# Altium PCB CH32x203C8U6-R0-1v0.PcbDoc
Units mil, origin at the board's own origin, x right, y up, seen from the top; angles counter-clockwise.
Board outline 1801.31 x 2018.15 mil, 2 copper layers (Top Layer, Bottom Layer); 40 components, 57 nets, 208 pads, 228 vias.
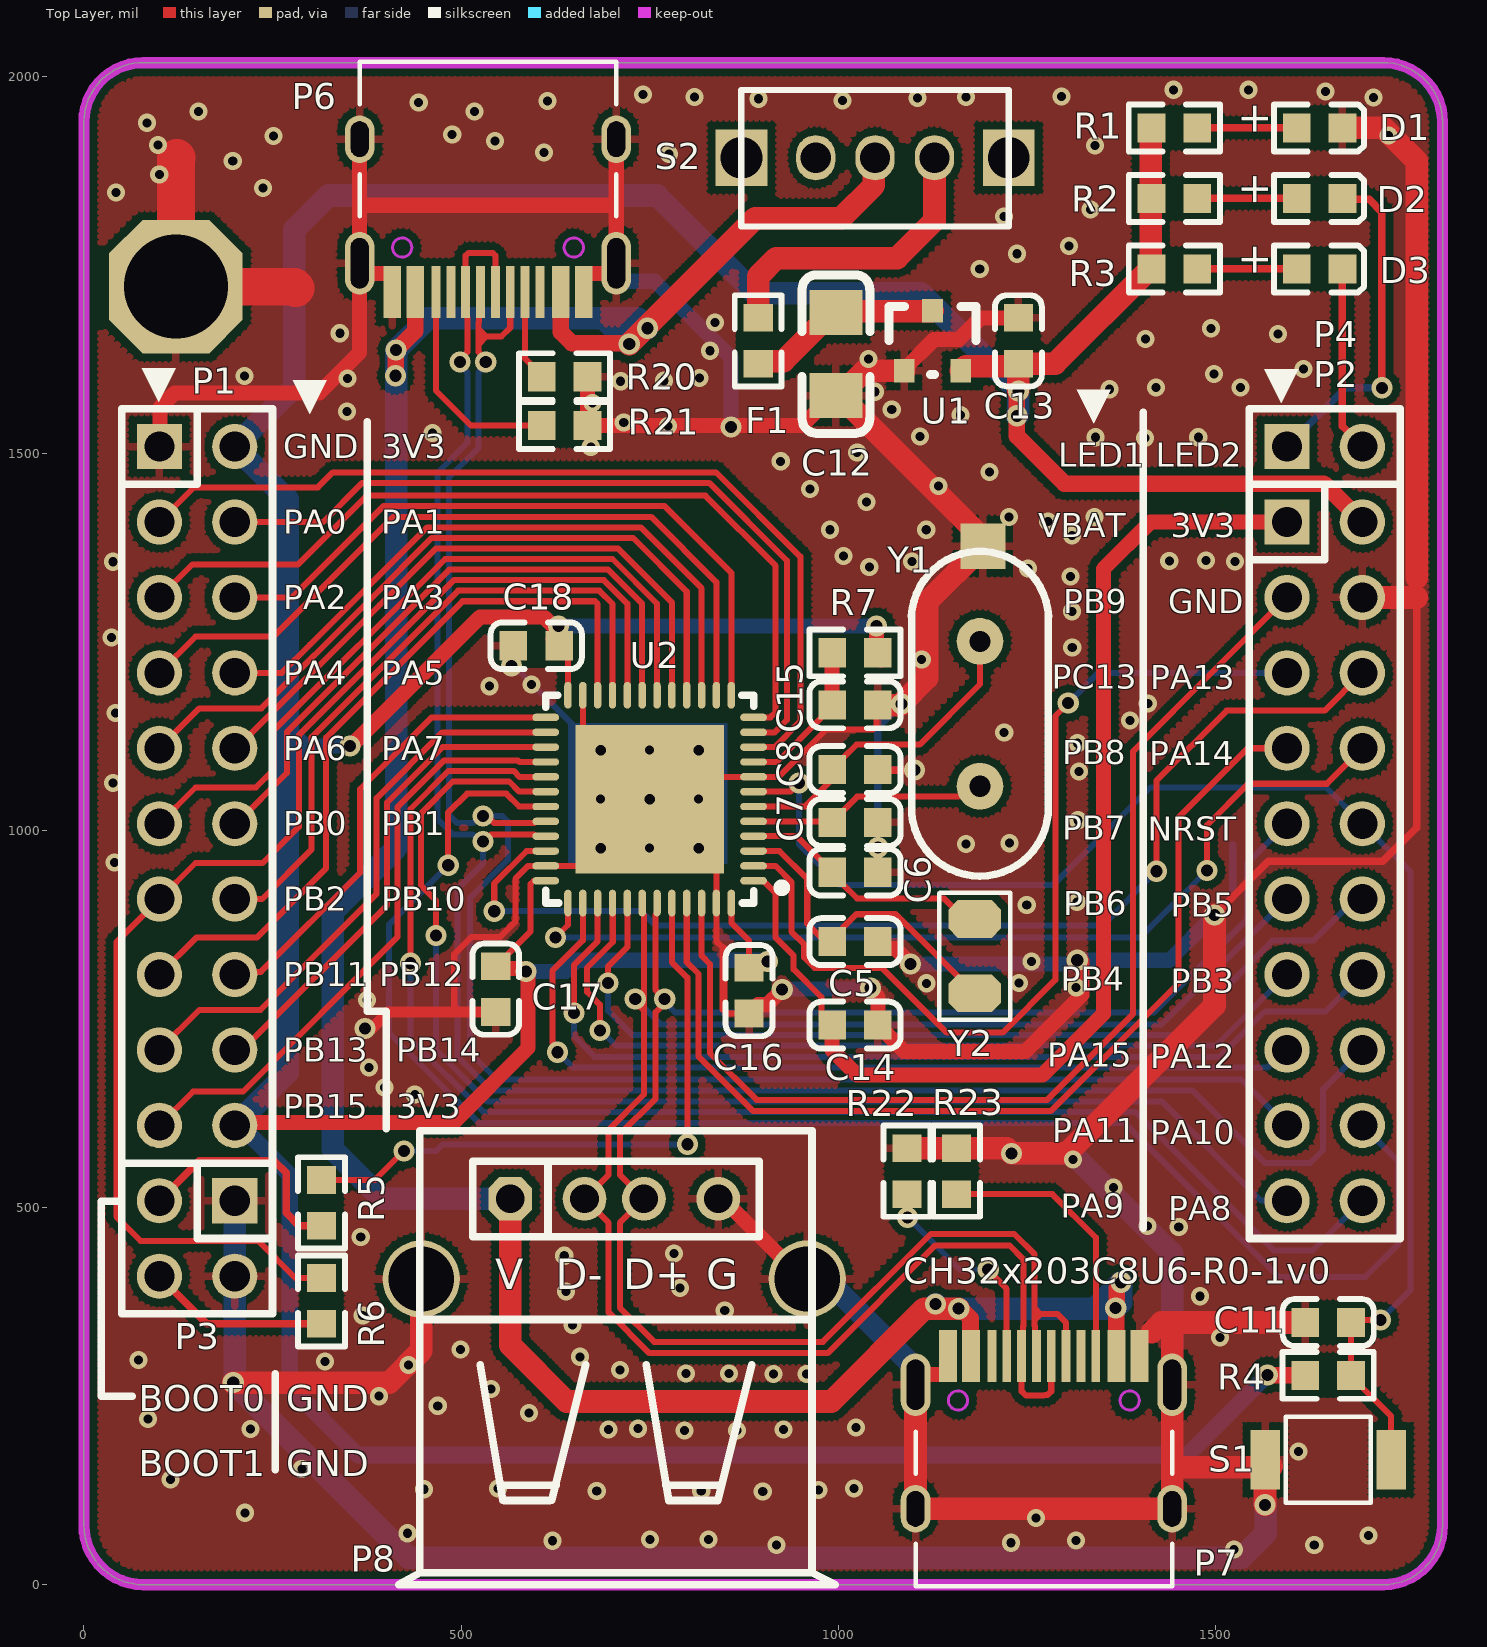
[diagram p0: Top Layer view]
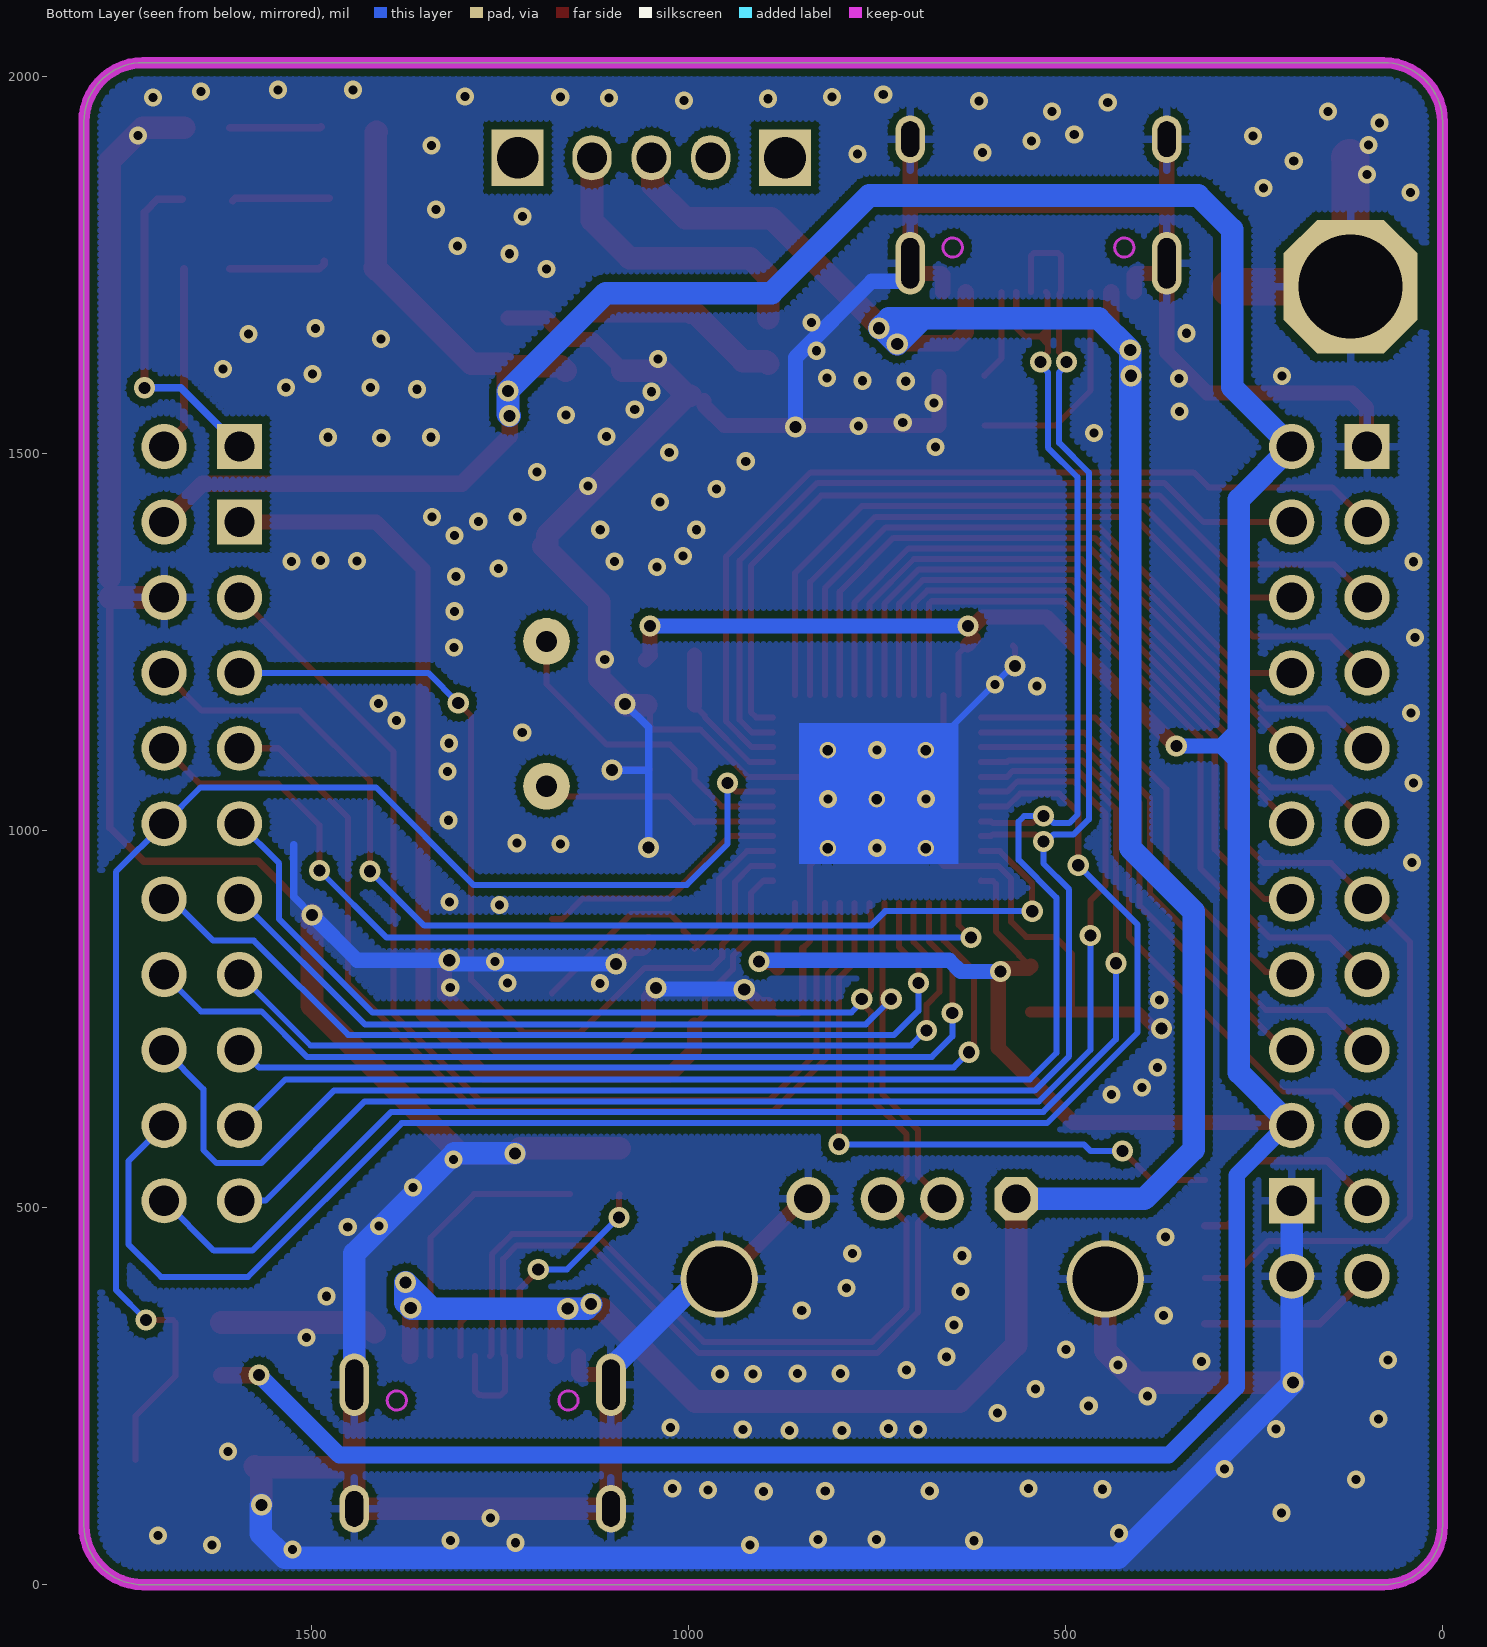
[diagram p1: Bottom Layer view, seen from below]

## Layer stack, top to bottom
Top Solder: solder mask 0.4, Solder Resist, Dk 3.5
Top Layer: signal copper 1.4
Dielectric 1: dielectric 12.6, FR-4, Dk 4.8
Bottom Layer: signal copper 1.4
Bottom Solder: solder mask 0.4, Solder Resist, Dk 3.5

## Board outline
0,78.74 0,1939.41 cw(c78.74,1939.41) 78.74,2018.15 1722.6,2018.15 cw(c1722.6,1939.43) 1801.31,1939.43 1801.31,78.74 cw(c1722.57,78.74) 1722.57,0 78.74,0 cw(c78.74,78.74)

## Design rules (kind name [scope] priority, off if disabled: settings)
Clearance Clearance_1 [InPolygon] p1: gap=10 ignorepadtopadclearanceinfootprint=FALSE
Clearance [All] p2: gap=6 ignorepadtopadclearanceinfootprint=FALSE
ComponentClearance [All] p1 off: gap=10 collisioncheckmode=3 verticalgap=10 showdistances=FALSE
DiffPairsRouting [All] p1: maxlimit=10 minlimit=7 mostfreqgap=8 toplayer_minwidth=6 toplayer_maxwidth=15 toplayer_prefwidth=8 bottomlayer_minwidth=6 bottomlayer_maxwidth=15 bottomlayer_prefwidth=8 maxuncoupledlength=500
MinimumSolderMaskSliver [All] p1 off: minsoldermaskwidth=10
PolygonConnect PolygonConnect_1 [IsVia] p1: connectstyle=Direct reliefconductorwidth=10 reliefentries=4 polygonreliefangle="90 Angle" airgapwidth=10
PolygonConnect [All] p2: connectstyle=Relief reliefconductorwidth=10 reliefentries=4 polygonreliefangle="90 Angle" airgapwidth=10
RoutingVias [All] p1: holewidth=16 width=28 viastyle="Through Hole" minholewidth=12 minwidth=24 maxholewidth=28 maxwidth=50
SilkToSilkClearance [All] p1 off: silktosilkclearance=10
SilkToSolderMaskClearance [IsPad] p1 off: minsilkscreentomaskgap=10 clearancetoexposedcopper=TRUE
SolderMaskExpansion [All] p1: expansion=4 istentingtop=FALSE
Width [All] p1: maxlimit=100 minlimit=6 preferedwidth=10
25 further rules are at their usual default settings.

## Classes and differential pairs
differential pair NewDifferentialPair2: +PA11 -PA12
differential pair NewDifferentialPair1: +PB6 -PB7

## Components (designator, comment, footprint, x,y, rotation, side; value= is the part's Value field where it differs from the comment)
C5 "12pF" 0603_C 992,852.69 r0 top
C6 "12pF" 0603_C 992,944.69 r0 top
C7 "22pF" 0603_C 1052.63,1010.69 r180 top
C8 "22pF" 0603_C 1052.63,1080.69 r180 top
C11 "0.1uF" 0603_C 1619.38,347.69 r0 top
C12 "10uF" 3216_C 997.01,1686.69 r90 top
C13 "10uF" 0603_C 1239.01,1619 r90 top
C14 "0.1uF" 0603_C 992,742 r0 top value=15pF
C15 "0.1uF" 0603_C 992,1166.69 r0 top value=15pF
C16 "0.1uF" 0603_C 882.01,757.37 r90 top value=15pF
C17 "0.1uF" 0603_C 546,759.37 r90 top value=15pF
C18 "0.1uF" 0603_C 569.37,1245 r0 top value=15pF
D1 "POWER  red" 0603+ 1608.01,1931.69 r0 top
D2 "LED1" 0603+ 1608.01,1838.19 r0 top
D3 "LED2" 0603+ 1608.01,1744.69 r0 top
F1 "500mA" 0603 894,1679.63 r270 top
P1 "HEADER 10x2" IDC20-2.54MM 100.01,1509.07 r0 top
P2 "HEADER 10x2" IDC20-2.54MM 1595.01,1409.07 r0 top
P3 "Header 2X2" IDC4-2.54mm 200.01,509.07 r270 top
P4 "HEADER 2" SIP2-2.54mm 1595.01,1509.07 r270 top
P6 "TYPE-C" TYPE-C-Receptacle-2.0 535.68,1713.93 r180 top
P7 "TYPE-C" TYPE-C-Receptacle-2.0 1272.68,303.38 r0 top
P8 "USB_A" USBAF 565.29,511.69 r0 top
R1 "1K" 0603 1476.01,1931.69 r180 top
R2 "1K" 0603 1415.38,1838.19 r0 top
R3 "1K" 0603 1415.38,1744.69 r0 top
R4 "10K" 0603 1680.01,277.69 r180 top
R5 "10K" 0603 315.01,536.69 r270 top
R6 "10K" 0603 315.01,406.69 r270 top
R7 "0Ω" 0603 1052.63,1235.69 r180 top value=10K
R20 "NC(5.1K)" 0603 607,1601.69 r0 top
R21 "NC(5.1K)" 0603 607,1537 r0 top
R22 "NC(5.1K)" 0603 1091.01,518 r90 top
R23 "NC(5.1K)" 0603 1157,518 r90 top
S1 "RST" 贴片按键 1733.2,165.69 r180 top
S2 "SW" KEY2 1049,1892 r0 top
U1 "6219P33M" SOT-23 1087.61,1609.55 r0 top
U2 "CH32V203CxU" QFN48_7X7 750.01,1041.69 r90 top
Y1 "8M" XT_AT49 1188.01,1250.81 r180 top
Y2 "32.768k" FC-135 1181.01,784.26 r90 top

## Footprints (in the part's own frame and the unit in brackets; to place one, negate y for a bottom-side part, rotate by r counter-clockwise, add the part's x,y. Pads: shape width x height; smd on the part's side, far side on the other; paste and mask are expansions set on the pad)
0603 [mm]
  rect 0.93x0.98 smd: 1(0,0) 2(1.54,0)
  silkscreen extent -0.76,-0.79 2.3,0.79
0603+ [mm]
  rect 0.93x0.98 smd: 1(0,0) 2(1.54,0)
  silkscreen extent -0.76,-0.79 2.27,0.79
0603_C [mm]
  rect 0.93x0.98 smd: 1(0,0) 2(1.54,0)
  silkscreen extent -0.76,-0.79 2.31,0.79
3216_C [mil]
  rect 60x70 smd: 1(0,0) 2(-110,0)
  silkscreen extent -160,-45 50,45
FC-135 [mil]
  oct 50x70 smd: 1(0,0) 2(98.43,0)
  silkscreen extent -35,-47 133,47
IDC4-2.54mm [mil]
  rect 60x60 hole 40: 1(0,0)
  round 60 hole 40: 2(100,0) 3(0,-100) 4(100,-100)
  silkscreen extent -50,-150 150,50
IDC20-2.54MM [mil]
  rect 60x60 hole 40: 1(0,0)
  round 60 hole 40: 2(100,0) 3(0,-100) 4(100,-100) 5(0,-200) 6(100,-200) 7(0,-300) 8(100,-300) 9(0,-400) 10(100,-400) 11(0,-500) 12(100,-500) 13(0,-600) 14(100,-600) 15(0,-700) 16(100,-700) 17(0,-800) 18(100,-800) 19(0,-900) 20(100,-900)
  silkscreen extent -50,-950 150,50
KEY2 [mm]
  rect 1.75x1.9 hole 1.4: 0(-4.5,0) 0(4.5,0)
  oval 1.321x1.524 hole 1.016: 1(0,0) 2(-2,0) 3(2,0)
  silkscreen extent -4.51,-2.31 4.5,2.29
QFN48_7X7 [mm]
  round 0.559 hole 0.356 mask+0.102: 0(-1.651,-1.651) 0(-1.651,1.651) 0(0,0) 0(1.651,-1.651) 0(1.651,1.651)
  rect 5x5 smd mask+0.102: 0(0,0)
  oval 0.25x0.9 smd mask+0.102: 1(-2.75,-3.5) 2(-2.25,-3.5) 3(-1.75,-3.5) 4(-1.25,-3.5) 5(-0.75,-3.5) 6(-0.25,-3.5) 7(0.25,-3.5) 8(0.75,-3.5) 9(1.25,-3.5) 10(1.75,-3.5) 11(2.25,-3.5) 12(2.75,-3.5) 25(2.75,3.5) 26(2.25,3.5) 27(1.75,3.5) 28(1.25,3.5) 29(0.75,3.5) 30(0.25,3.5) 31(-0.25,3.5) 32(-0.75,3.5) 33(-1.25,3.5) 34(-1.75,3.5) 35(-2.25,3.5) 36(-2.75,3.5)
  oval 0.9x0.25 smd mask+0.102: 13(3.5,-2.75) 14(3.5,-2.25) 15(3.5,-1.75) 16(3.5,-1.25) 17(3.5,-0.75) 18(3.5,-0.25) 19(3.5,0.25) 20(3.5,0.75) 21(3.5,1.25) 22(3.5,1.75) 23(3.5,2.25) 24(3.5,2.75) 37(-3.5,2.75) 38(-3.5,2.25) 39(-3.5,1.75) 40(-3.5,1.25) 41(-3.5,0.75) 42(-3.5,0.25) 43(-3.5,-0.25) 44(-3.5,-0.75) 45(-3.5,-1.25) 46(-3.5,-1.75) 47(-3.5,-2.25) 48(-3.5,-2.75)
  silkscreen extent -3.5,-4.58 3.5,3.5
SIP2-2.54mm [mil]
  rect 60x60 hole 40: 1(0,0)
  round 60 hole 40: 2(0,100)
  silkscreen extent -50,-50 50,150
SOT-23 [mm]
  rect 0.7x0.8 smd: 1(0,0) 2(1.9,0) 3(0.95,2.02)
  silkscreen extent -0.51,-0.13 2.41,2.16
TYPE-C-Receptacle-2.0 [mm]
  oval 1x2.1 hole 0.6 slot 1.7 at 90 deg: 0(-4.32,-0.97) 0(4.32,-0.97)
  oval 1x1.6 hole 0.6 slot 1.2 at 90 deg: 0(-4.32,-5.15) 0(4.32,-5.15)
  rect 0.6x1.75 smd: A1(-3.225,0) A4(-2.45,0) B1(3.225,0) B4(2.45,0)
  rect 0.3x1.75 smd: A5(-1.25,0) A6(-0.25,0) A7(0.25,0) A8(1.25,0) B5(1.75,0) B6(0.75,0) B7(-0.75,0) B8(-1.75,0)
  Keep-Out Layer circle w0.1: c-2.89,-1.5 r0.325
  Keep-Out Layer circle w0.1: c2.89,-1.5 r0.325
  silkscreen extent -4.32,-7.75 4.32,-2.55
USBAF [mm]
  round 2.6 hole 2.2: 0(-3,-2.7) 0(10,-2.7)
  oct 1.473x1.473 hole 0.965: 1(0,0)
  round 1.473 hole 0.965: 2(2.5,0) 3(4.5,0) 4(7,0)
  silkscreen extent -3.75,-12.99 10.95,2.29
XT_AT49 [mil]
  rect 60x60 smd: 0(-3.99,-126.19)
  round 62 hole 28: 1(0,0) 2(0,192.13)
  silkscreen extent -91,-119 91,311
贴片按键 [mm]
  rect 1x2 smd: 1(0,0) 2(4.242,0)
  silkscreen extent 0.69,-1.45 3.55,1.45

## Part data
C5 C6 C7 C8 C11 C14 C15 C16 C17 C18: library part Cap, "Capacitor", LatestRevisionDate=17-Jul-2002, LatestRevisionNote="Re-released for DXP Platform.", PackageReference=RAD-0.3, Published=8-Jun-2000, Publisher="Altium Limited"
C12 C13: library part CAP, "Capacitor"
D1 D2 D3: library part LED0, "Typical INFRARED GaAs LED", LatestRevisionDate=08-Jul-2005, LatestRevisionNote="Mech Layer 1 removed.", PackageReference=LED-0, Published=8-Jun-2000, Publisher="Altium Limited"
F1: library part FUSE1, "Fuse"
P1 P2: library part "Header 10X2", "Header, 10-Pin, Dual row"
P3: "Header, 2-Pin, Dual row", LatestRevisionDate=17-Jul-2002, LatestRevisionNote="Re-released for DXP Platform.", Publisher="Altium Limited"
P4: library part 2HEAD
P6 P7: library part TYPE-C1
P8: library part USB, "USB Port"
R1 R2 R3: library part "Res Semi", "Semiconductor Resistor", LatestRevisionDate=17-Jul-2002, LatestRevisionNote="Re-released for DXP Platform.", PackageReference=AXIAL-0.5, Published=8-Jun-2000, Publisher="Altium Limited"
R4 R5 R6 R7 R20 R21 R22 R23: library part Res2, "Resistor"
  R4 R5 R6 R7: LatestRevisionDate=17-Jul-2002, LatestRevisionNote="Re-released for DXP Platform.", PackageReference=AXIAL-0.4, Published=8-Jun-2000, Publisher="Altium Limited"
S1: library part KEY
U2: "RISC-V LMD-MCU, 144MHz, 2*USB FS, CAN"
Y1 Y2: library part XTAL, "Crystal Oscillator", LatestRevisionDate=17-Jul-2002, LatestRevisionNote="Re-released for DXP Platform.", PackageReference=R38, Published=8-Jun-2000, Publisher="Altium Limited"

## Free pads (board coordinates)
  oct 177.17x177.17 hole 137.8: 0(121.96,1721.05)

## Via types
v1: diameter 24, hole 12, Top Layer to Bottom Layer, tented both sides, 173 vias
v2: diameter 28, hole 16, Top Layer to Bottom Layer, tented both sides, 55 vias

## Nets (pads, with @x,y where several pads share a name; then routed paths per layer and width w, separated by ;. In a path a pad name is that pad's centre, name@x,y a point inside that pad or via, vN(x,y) a via of type N, cw(c..) or ccw(c..) an arc to the next point about the centre after c; other vN are vias at no path point)
+5V: P6.A4 P6.B4 P7.A4 P7.B4 P8.1 S2.1 | length 3885.2
  Top Layer w22: v2(413,1603) 413.5,1603.5 413.5,1636.5 v2(414,1637) 439.22,1662.22 P6.B4 ; P6.A4 632.14,1660.86 647,1646 v2@723,1646 ; v2(1159.82,366) 1160.97,364.85 1163.9,364.85 1175.41,353.33 1175.41,304.19 P7.A4 ; P7.B4 1368.57,303.95 1368.57,366.43 v2(1368,367) 1369.15,368.15 1369.15,393.52 1375,399.38 v2(1375,401)
  Top Layer w30: P8.1 565.29,317.71 640,243 991,243 1114,366 v2(1159.82,366) ; v2(723,1645) 890,1812 1004,1812 1047.4,1855.4 1047.4,1890.4 S2.1
  Bottom Layer w30: P8.1 395.31,511.69 330,577 330,893 414,977 v2(414,1637) 456,1679 689,1679 ; v2(1129,372) 1135,366 v2(1159.82,366) 1340,366 ; 689,1679 734,1679 v2(747,1666) 744,1666 v2(723,1645) 689,1679 ; 1340,366 v2(1375,401) 1375,374 v2(1368,367) 1367,366 1340,366
BOOT0: R5.1 U2.44 | length 832.9
  Top Layer w8: R5.1 385.71,536.69 v2(424.34,575.31) ; U2.44 779.54,825.46 800,805 v2(800,584)
  Bottom Layer w8: v2(424.34,575.31) 466.98,575.31 475.66,584 v2(800,584)
BOOT1: P1.13 R6.1 U2.20 | length 1751.5
  Top Layer w8: R6.1 280.31,406.69 231,456 75,456 43,488 43,852.05 P1.13 147.95,957 237,957 285,1005 285,1126.6 490.4,1332 689.2,1332 720.49,1300.71 U2.20
GND: C5.2 C6.2 C7.1 C8.1 C11.1 C12.2 C13.2 C14.2 C15.2 C16.1 C17.1 C18.1 D1.2 P1.1 P2.4 P3.1 P3.2 P6.0 P6.A1 P6.B1 P7.0 P7.A1 P7.B1 P8.0 P8.4 pad.0 R20.2 R21.2 R22.2 R23.2 S1.2 U1.1 U2.0 U2.8 U2.23 U2.35 U2.47 Y1.0 | length 12470.7
  Top Layer w8: 499,759.37 491,767.37 491,836 514,859 552,859 572,879 572,936 589.1,953.1 U2.35 661.43,953.1 685.01,976.69 U2.0@750.01,1041.69 ; v2(567,1218) 567,1242.63 C18.1 ; U2.23 661.43,1130.27 685.01,1106.69 U2.0@750.01,1041.69 ; 848,763 853.63,757.37 C16.1 C16.1@893.62,768.98 ; 848,844 838.6,853.4 U2.47 838.6,953.1 815.01,976.69 U2.0@750.01,1041.69 ; C15.2@1056,1166 1051,1161 1051,1138.69 1046.31,1134 984,1134 921.21,1071.21 U2.8 779.54,1071.21 U2.0@750.01,1041.69
  Top Layer w10: 848,763 848,844 ; C8.1 1053.32,1080 v2(1101,1080) ; v2(1499,888) 1570,959 1722,959 1767,1004 1767,1309 1767,1335
  Top Layer w15: v2(372.65,737.52) 381.63,737.52 403.48,759.37 499,759.37 C17.1
  Top Layer w20: P1.1 101,1510.05 101,1561 120,1580 312,1580 365.6,1633.6 P6.0@365.6,1738.38 ; P6.0@365.6,1746.4 365.6,1752.12 365.6,1829 ; P6.0@365.6,1916.69 365.6,1829 ; P6.0@373.62,1738.38 406.9,1738.38 408.71,1736.57 P6.B1 ; P6.A1 662.65,1736.57 664.46,1738.38 696.81,1738.38 701,1742.57 P6.0@701,1751 ; R21.2 R21.2@668,1537 ; R20.2 667.63,1537.37 R21.2@668,1537 ; P6.0@705.76,1752.12 705.76,1829 ; P6.0@705.76,1916.69 705.76,1829 ; P8.4 846.79,511.69 953.09,405.39 P8.0@958.99,405.39 ; C16.1@893.62,768.98 905.79,768.98 v2(925.81,789) ; C12.2@979,1570 979,1563.67 952.33,1537 R21.2@668,1537 ; v2(1043,791) 1043,788.84 1052.63,779.21 C14.2 ; C5.2 1052.63,851.7 1060.94,843.39 1075.61,843.39 v2(1096,823) ; C14.2@1061.92,732.71 1087.63,707 1248,707 1323,782 1323,827 v2@1322,828 ; U1.1 1087.61,1611.52 1127.09,1651 1160,1651 1188.63,1679.63 C13.2 ; P7.0@1102.6,265.19 1102.6,269.98 1111.55,278.93 1143.9,278.93 1145.71,280.74 P7.A1 ; 365.6,1829 705.76,1829
  Top Layer w30: v2(198,268) 405,268 447.18,310.18 P8.0@447.18,405.39 ; C12.2 C12.2@1002.01,1576.69 ; C15.2@1056,1166 1082,1166 v2(1084,1168) 1118,1202 1118,1303 Y1.0 ; U1.1 1034.88,1609.55 C12.2@1002.01,1576.69 ; R22.2 R23.2 1223.37,578.63 v2(1230,572) 1303,572 1499,768 v2(1499,888) ; P7.0@1102.6,100.62 1102.98,101 P7.0@1442.76,101 ; P7.0@1102.6,265.19 1102.6,108.4 P7.0@1103,108 ; Y1.0@1187,1377 1187,1391.7 C12.2@1002.01,1576.69 ; 1416,335 1428.69,347.69 C11.1 ; 1442,345 1442.76,344.24 P7.0@1442.76,265.19 ; P7.0@1442.76,100.62 P7.0@1442.76,101 ; P7.0@1446,268 1442.76,264.76 1442.76,156 ; P7.0@1448,101 P7.0@1442.76,101 ; v2(1566,106) 1566,154 S1.2@1568,156 ; S1.2@1575,157 1574,156 S1.2@1568,156 ; D1.2 1723.31,1931.69 1767,1888 1767,1335 ; P2.4@1695.01,1309 1767,1309 ; P7.0@1442.76,101 1442.76,156 ; 1442.76,156 S1.2@1568,156
  Top Layer w50: 123,1892 121.96,1890.96 pad.0 278.95,1721.05 281,1719
  Bottom Layer w8: v2(567,1218) 570.35,1218 681.66,1106.69 U2.0@685.01,1106.69
  Bottom Layer w10: v2(1052.63,977.69) 1052.63,1080 ; v2(1084,1168) 1052.63,1136.63 1052.63,1080 ; v2(1101,1080) 1052.63,1080 ; v2(1499,888) 1523,912 1523,981
  Bottom Layer w20: P6.0@705.76,1752.12 705.76,1737.18 714.71,1728.23 756.77,1728.23 858,1627 v2(858,1535) ; v2(925.81,789) 926.81,790 1042,790 v2(1043,791) ; v2(1096,823) 1317,823 1322,828 1439,828 v2(1499,888)
  Bottom Layer w30: P3.2 200.01,270.01 v2(198,268) 430,36 1535,36 1567,68 1567,105 v2(1566,106) ; P3.2@200.01,413.99 P3.1 ; P8.0@970,400 978.46,391.54 997.91,391.54 1102.6,286.84 P7.0@1102.6,265.19 ; v2(1230,572) 1310,572 1442.76,439.24 P7.0@1442.76,265.19
  other v1: 1524.74,46.74 918.23,52.59 1631.27,52.66 1229.21,55.68 621.44,58.3 1315.17,58.54 750.71,59.98 828.07,59.98 1703.27,65.49 428.8,68.29 1262.16,88.63 213.34,95.4 900.03,123.75 679.93,124.46 818.46,124.46 974.13,125.36 450.81,126.59 548.85,127.66 1020.85,127.78 114.88,139.63 288.83,153.23 1610.15,176.69 796.49,204.73 865.65,204.73 695.45,205.81 927.76,206.04 220.63,206.52 734.35,206.89 1023.44,208.51 84.92,219.54 589.86,227.74 469.13,237.27 391.29,249.97 539.82,259.51 798.15,280.1 855.34,280.1 914.14,279.29 958.04,279.29 710.88,284.98 430.21,291.28 319.81,296.04 72.07,298.02 657.6,302.24 499.31,311.93 1506.17,328 647.76,344.21 369.68,356.86 849.6,363.7 1479.76,382.49 639.19,388.63 790.37,393.31 636.85,436.17 782.58,439.29 367.04,461.1 1451.56,474.44 1410.1,475.75 1365.15,526.88 1311.22,563.96 438.67,650.07 398.42,659.34 377.87,685.98 375.55,775.16 1315.62,791.86 1117.06,797.44 1239.98,797.96 1256.2,826.34 1250.07,901.03 1316.57,905.07 40.73,957.59 750.01,976.69 1169.3,981.9 1227.4,983.18 1318.01,1013.63 685.01,1041.69 815.01,1041.69 38.72,1062.79 1319.45,1078.34 750.01,1106.69 1317.29,1115.73 1220.18,1129.91 1386.96,1145.77 41.73,1155.98 1410.53,1168.25 537.72,1191.35 593.54,1193.63 1110.77,1226.77 1310.4,1242.86 36.72,1256.18 1309.8,1290.69 1308.01,1336.71 1251.91,1347.39 1041.28,1349.24 38.72,1356.37 1097.72,1356.87 1526.23,1356.87 1439.05,1357.42 1487.85,1357.97 1006.96,1363.73 1309.8,1391.11 989.42,1398.82 1116.78,1398.82 1278.46,1409.72 1226.69,1415.48 1339.69,1415.62 1037.47,1435.42 962.73,1452.96 1132.8,1456.78 1200.63,1475.16 923.83,1489.57 1025.27,1501.01 672,1508.5 1407.1,1520.5 1341.39,1521.44 1477.49,1521.44 1108.39,1522.36 462.07,1526.92 774.36,1536.09 715.69,1541.23 1161.96,1550.81 348.8,1555.64 1071.02,1558.21 674.52,1567.07 1048.73,1581.74 1359.89,1585.06 1421.29,1587.39 1533.22,1587.39 711.68,1595.66 769.02,1596.34 349.59,1599.51 816.3,1600.15 212.81,1602.69 1498.24,1605.27 1616.76,1611.68 1040.3,1625.04 829.84,1636.12 1407.3,1651.91 1582.96,1658.12 339.22,1659.34 1494.35,1665.9 836.68,1673.39 1187.76,1744.37 1237.17,1764.76 1306.19,1774.95 1219.92,1814.17 1334.43,1823.58 42.49,1846.18 237.38,1851.76 99.89,1869.66 197.29,1887.93 775.77,1897.19 609.81,1899.15 98.15,1908.8 1340.7,1908.28 545.13,1914.18 251.2,1920.97 1729.74,1921.59 488.29,1922.68 83.36,1938.37 152.06,1953.15 517.69,1953.38 443.86,1965.14 614.39,1967.11 1005.81,1967.89 894.44,1970.24 1105.41,1971.03 1709.9,1971.69 809.74,1972.6 1169.72,1972.6 1296,1973.38 741.5,1975.73 1646.22,1980.04 1444.75,1982.13 1543.92,1982.13
  other v2: 1317,828
LED1: D2.2 P4.1 | length 448.3
  Top Layer w10: D2.2@1671,1836.95 1704.05,1836.95 1721,1820 v2(1721,1587)
  Bottom Layer w10: P4.1 1620.01,1534.07 1672.95,1587 v2(1721,1587)
LED2: D3.2 P4.2 | length 242.8
  Top Layer w10: D3.2 1668.64,1536.36 P4.2@1693,1512
NetD1_1: D1.1 R1.1 | length 121.6
  Top Layer w10: R1.1@1487,1933 1488.31,1931.69 D1.1
NetD2_1: D2.1 R2.2 | length 129.3
  Top Layer w10: R2.2 1600.81,1838.19 D2.1@1604,1835
NetD3_1: D3.1 R3.2 | length 131.6
  Top Layer w10: R3.2@1483,1755 1483,1751.01 1489.32,1744.69 D3.1
NetF1_1: F1.1 S2.3 | length 402.9
  Top Layer w30: F1.1 894,1735 918,1759 1078,1759 1127.74,1808.74 S2.3
NetP3_3: P3.3 R5.2 | length 303.6
  Top Layer w10: P3.3 152.95,562 252,562 268,546 268,493 284.94,476.06 R5.2
NetP3_4: P3.4 R6.2 | length 241.1
  Top Layer w10: P3.4 163.03,346.06 R6.2
NetP6_A5: P6.A5 R20.1 | length 120.4
  Top Layer w8: P6.A5 584.89,1625.78 607,1603.67 R20.1@607,1602.69
NetP6_B5: P6.B5 R21.1 | length 290.1
  Top Layer w8: P6.B5 466.78,1583.22 513,1537 R21.1
NetP7_A5: P7.A5 R22.1 | length 291.7
  Top Layer w8: R22.1 1092,517.01 v2(1092,487) ; v2(1199,418) 1199,416.83 1223.47,392.36 P7.A5
  Bottom Layer w8: v2(1092,487) 1161,418 v2(1199,418)
NetP7_B5: P7.B5 R23.1 | length 365.5
  Top Layer w8: R23.1 1284,518 1341.58,460.42 P7.B5
NRST: C11.2 P2.10 R4.1 S1.1 U2.7 | length 1934.1
  Top Layer w8: U2.7 936.53,1051.53 v2(948,1063) ; v2(1719,351) 1683.33,351 C11.2 R4.1 1680.01,276.7 1733.2,223.52 S1.1
  Bottom Layer w8: v2(948,1063) 948,982 1002,928 1285,928 1414,1057 1647.08,1057 P2.10 1759,945.08 1759,391 v2(1719,351)
PA0: P1.3 U2.10 | length 1218.3
  Top Layer w8: P1.3 145.95,1455 310,1455 330,1475 838,1475 950,1363 950,1144.8 915.78,1110.58 U2.10
PA1: P1.4 U2.11 | length 1058.5
  Top Layer w8: P1.4 317.07,1409.07 369,1461 829,1461 932,1358 932,1146.6 915.67,1130.27 U2.11
PA2: P1.5 U2.12 | length 1137.5
  Top Layer w8: P1.5 143.95,1353 284,1353 375,1444 824,1444 917,1351 917,1157 909.95,1149.95 U2.12
PA3: P1.6 U2.13 | length 907.2
  Top Layer w8: P1.6 276.07,1309.07 397,1430 770,1430 858.28,1341.72 U2.13
PA4: P1.7 U2.14 | length 1010.1
  Top Layer w8: P1.7 147.95,1257 251,1257 410,1416 752,1416 838.6,1329.4 U2.14
PA5: P1.8 U2.15 | length 873.9
  Top Layer w8: P1.8 262.47,1209.07 300,1246.6 455.4,1402 738,1402 818.91,1321.09 U2.15
PA6: P1.9 U2.16 | length 981.5
  Top Layer w8: P1.9 152.95,1162 235.2,1162 378,1304.8 461.2,1388 728,1388 799.23,1316.77 U2.16
PA7: P1.10 U2.17 | length 841.9
  Top Layer w8: P1.10 202.07,1109.07 392,1299 467,1374 708,1374 779.54,1302.46 U2.17
PA8: P2.20 U2.29 | length 1914.8
  Top Layer w8: v2@434.53,824 433,825.53 433,1028.6 483.4,1079 569.6,1079 577.39,1071.21 U2.29
  Bottom Layer w8: v2(433,824) 433,723.19 529.19,627 1394,627 1578,443 1628.95,443 P2.20
PA9: P2.19 U2.30 | length 1721.2
  Top Layer w8: v2(467,861) 467,907 447,927 447,1022.8 489.2,1065 563.8,1065 577.27,1051.53 U2.30
  Bottom Layer w8: v2(467,861) 467,708.99 534.99,641 1429,641 1560.53,509.47 1594.61,509.47 P2.19
PA10: P2.18 U2.31 | length 2138.6
  Top Layer w8: v2(483,954) 483,1024 508,1049 560,1049 577.16,1031.84 U2.31
  Bottom Layer w8: v2(483,954) 404.18,875.18 404.18,732.21 524.39,612 1380,612 1584,408 1699,408 1742,451 1742,562.08 P2.18
PA11: P2.17 P6.A7 P6.B7 U2.32 | length 2467.8
  Top Layer w8: P6.A7 523.93,1712.02 523.93,1674.38 523.28,1673.73 523.28,1664.52 ; v2(529,1019.32) 534.41,1019.32 543.91,1009.82 596.58,1009.82 598.92,1012.16 U2.32 ; v2(532.78,1621) 532.78,1625.01 523.28,1634.51 523.28,1644.92 ; P6.B7 565.21,1666.88 553.65,1655.32 533.68,1655.32 ; 523.28,1644.92 523.28,1655.32 ; 523.28,1644.92 533.68,1655.32 ; 523.28,1655.32 532.48,1655.32 ; 523.28,1655.32 523.28,1664.52 ; 523.28,1664.52 532.48,1655.32 ; 532.48,1655.32 533.68,1655.32
  Bottom Layer w8: v2(532.78,1621) 532.78,1616.99 523.28,1607.49 523.28,1507.71 484,1468.43 484,1021 495.18,1009.82 515.49,1009.82 524.99,1019.32 v2(529,1019.32) 554.68,1019.32 562,1012 562,961 512,911 512,705 547,670 1534.08,670 P2.17
PA12: P2.16 P6.A6 P6.B6 U2.33 | length 2675.3
  Top Layer w8: v2(498.78,1621) 498.78,1625.01 508.28,1634.51 508.28,1649.11 P6.B6@508.28,1679.94 ; P6.B6@508.06,1679.94 508.06,1712.02 P6.B6 506.15,1762.17 509.67,1765.69 542.01,1765.69 545.52,1762.17 P6.A6 ; 539.67,994.82 596.58,994.82 598.92,992.47 U2.33
  Bottom Layer w8: v2(498.78,1621) 498.78,1616.99 508.28,1607.49 508.28,1513.93 469,1474.65 469,1014.79 488.97,994.82 515.49,994.82 524.99,985.32 v2(529,985.32) 529,956 495,922 495,700.79 540.79,655 1470,655 1566,559 1625.56,559 1643,576.44 1643,657.05 P2.16
PA13: P2.6 U2.34 | length 1490.9
  Top Layer w8: v2(544,893) 544,929.98 586.81,972.79 U2.34 ; v2(1422,946) 1422,1066 1515,1159 1644.95,1159 P2.6
  Bottom Layer w8: v2(544,893) 739,893 758,874 1350,874 v2(1422,946)
PA14: P2.8 U2.37 | length 1262
  Top Layer w8: v2(625,858) 641.75,874.75 U2.37 ; v2(1489,947) 1489,1007 1544,1062 1647.95,1062 P2.8
  Bottom Layer w8: v2(625,858) 1400,858 v2(1489,947)
PA15: P2.15 U2.38 | length 1202.4
  Top Layer w8: v2(628,706) 628,711.41 621,718.41 621,814 661.43,854.43 U2.38
  Bottom Layer w8: v2(628,706) 648,686 1569.31,686 1592.38,709.07 P2.15
PB0: P1.11 U2.18 | length 981.7
  Top Layer w8: P1.11 147.95,1057 228,1057 251,1080 251,1132.2 478.8,1360 700.8,1360 759.86,1300.94 U2.18
PB1: P1.12 U2.19 | length 851.5
  Top Layer w8: P1.12 201.77,1009.07 269,1076.29 269,1130.4 484.6,1346 695,1346 740.17,1300.83 U2.19
PB3: P2.14 U2.39 | length 1291.2
  Top Layer w8: v2(650,758) 650,822 681,853 681,875.94 681.12,876.06 U2.39
  Bottom Layer w8: v2(650,758) 650,727 677,700 1505.75,700 1565.75,760 1645.95,760 P2.14
PB4: P2.13 U2.40 | length 1148.5
  Top Layer w8: v2(684,735) 684,769 667,786 667,818 701.15,852.15 701.15,903.54 U2.40
  Bottom Layer w8: v2(684,735) 685.05,735 705.05,715 1500.95,715 P2.13
PB5: P2.12 U2.41 | length 1241.6
  Top Layer w8: v2(695,798) 695,820 720.84,845.84 720.84,903.54 U2.41
  Bottom Layer w8: v2(695,798) 695,761 727,729 1451,729 1576,854 1630,854 1685.07,909.07 P2.12
PB6: P2.11 P7.A7 P7.B7 P8.2 U2.42 | length 2453.8
  Top Layer w8: v2@731,769 734.51,769 742.51,761 ; U2.42 740.17,890.6 742.51,888.25 742.51,810.43 742.51,761 ; P7.A7 1282.52,256.37 1277.84,251.69 1274.01,251.69 1273.01,250.69 1249.01,250.69 1243.15,256.55 P7.B7 1245.06,305.28 1245.06,342.92 1245.5,343.36 1245.5,358.69 1245.5,431.72 1227.21,450 1129,450 986,307 749.7,307 695.59,361.11 695.59,479.82 P8.2 695.59,543.56 695.59,603.26 742.51,650.19 742.51,761
  Bottom Layer w8: v2@731.98,769.98 737.53,769.98 764.51,743 1428.95,743 P2.11
  other v2: 731,776.51
PB7: P2.9 P7.A6 P7.B6 P8.3 U2.43 | length 2463.6
  Top Layer w8: U2.43 759.86,890.6 757.51,888.25 757.51,816.64 757.51,789 v2(770,776.51) 770,771.1 758,759.1 758,752.06 757.51,751.57 757.51,643.97 710.59,597.05 710.59,543.56 P8.3 710.59,479.82 710.59,367.33 755.91,322 979.79,322 1122.79,465 1233.43,465 1260.5,437.93 1260.5,366.35 ; 1260.5,368 1260.5,366.35 ; P7.A6 1260.93,305.28 1260.93,342.92 1260.5,343.36 1260.5,351.02 ; P7.B6 1302.21,347.49 1291.01,358.69 1268.16,358.69 ; 1260.5,351.02 1260.5,358.69 ; 1260.5,351.02 1268.16,358.69 ; 1260.5,358.69 1260.5,366.35 ; 1260.5,358.69 1268.16,358.69 ; 1260.5,366.35 1268.16,358.69
  Bottom Layer w8: v2(770,776.51) 770,772.68 783.68,759 1419,759 1542.4,882.4 1542.4,956.45 P2.9
PB8: P2.7 U2.45 | length 1348.2
  Top Layer w8: U2.45 799.23,825.57 815,809.8 815,700.2 887.2,628 1281.8,628 1451,797.2 1451,1017 1543.07,1109.07 P2.7
PB9: P2.3 U2.46 | length 1474
  Top Layer w8: U2.46 818.91,834.09 830,823 830,705 892,643 1277,643 1391,757 1391,1105.05 1499.03,1213.09 P2.3
PB10: P1.14 U2.21 | length 885.7
  Top Layer w8: P1.14 236.07,909.07 302,975 302,1123.8 496.2,1318 683.4,1318 700.8,1300.6 U2.21
PB11: P1.15 U2.22 | length 1010
  Top Layer w8: P1.15 148.95,858 229.15,858 321,949.85 321,1123 502,1304 677.6,1304 681.12,1300.49 U2.22
PB12: P1.16 U2.25 | length 618.4
  Top Layer w8: P1.16 203.45,812.5 234.5,812.5 366,944 366,1055 460.95,1149.95 U2.25
PB13: P1.17 U2.26 | length 761.1
  Top Layer w8: P1.17 152.95,762 234,762 388,916 388,1042.99 475.27,1130.27 U2.26
PB14: P1.18 U2.27 | length 658.3
  Top Layer w8: P1.18 210.07,709.07 402,901 402,1037.2 475.39,1110.58 U2.27
PB15: P1.19 U2.28 | length 814.5
  Top Layer w8: P1.19 144.95,654 211,654 416,859 416,1031.4 477.6,1093 575.4,1093 577.5,1090.9 U2.28
PC13: P2.5 U2.2 | length 1250.2
  Top Layer w8: U2.2 916.9,953.1 938,932 938,866 955,849 955,831.8 968.8,818 1058,818 1144,732 1218,732 1288,802 1288,1151.86 1305,1168.86 v2(1305,1169)
  Bottom Layer w8: v2(1305,1169) 1345.07,1209.07 P2.5
PC14: C5.1 U2.3 Y2.1 | length 444.3
  Top Layer w8: U2.3 922.21,972.79 959,936 959,876.67 977.69,857.98 977.69,856.99 992,842.69 C5.1@992,843.67 ; C5.1 1006.31,866.99 1006.31,871.15 1024.16,889 1076.27,889 Y2.1
PC15: C6.1 U2.4 Y2.2 | length 340.2
  Top Layer w8: U2.4 945.2,992.47 977.69,959.98 977.69,958.99 C6.1 1006.31,930.38 1006.31,928.69 1025,910 1140,910 1167.31,882.69 Y2.2
PD0: C7.2 U2.5 Y1.2 | length 321.3
  Top Layer w8: U2.5 990.53,1012.16 C7.2 992,1011.67 1025.33,1045 1159.72,1045 1173.4,1058.69 Y1.2
PD1: C8.2 U2.6 Y1.1 | length 432.2
  Top Layer w8: U2.6 955.84,1031.84 992,1068 992,1081.67 1006.31,1095.98 1024.33,1114 1108,1114 1188.01,1194.01 Y1.1
V5V: C12.1 F1.2 U1.3 | length 260
  Top Layer w30: F1.2 897.31,1622.31 927.64,1622.31 992.01,1686.69 C12.1 998.66,1688.33 1124.27,1688.33 U1.3
VBAT: C14.1 P2.1 U2.1 | length 1535
  Top Layer w8: U2.1 900.6,933.42 917,917.02 917,858 941,834 941,816 977.69,779.31 977.69,756.31 C14.1
  Top Layer w20: C14.1 992,709 1025,676 1271,676 1352,757 1352,1347 1414,1409 P2.1@1589,1409
VCC: C13.1 C16.2 C17.2 C18.2 P1.2 P1.20 P2.2 R1.2 R2.1 R3.1 R4.2 R7.1 U1.2 U2.24 U2.36 U2.48 | length 7540.1
  Top Layer w8: C17.2 546.98,820 561.29,834.31 561.29,835.29 592,866 592,928.98 596.08,933.07 611.87,933.07 U2.36 ; C18.2@630,1246 641.75,1234.25 U2.24 ; U2.48 858.28,877.72 882.01,853.99 C16.2
  Top Layer w20: P1.20 203.95,613 490,613 589,712 589,804.34 587.53,805.81 587.53,811.47 v2(586,813) 583.84,813 580,816.84 549.16,816.84 C17.2 ; v2(353,1112) 354,1112 525,1283 609.98,1283 621.69,1271.28 628.72,1271.28 v2(629,1271) ; C18.2@621.69,1254.31 C18.2@630,1246 ; C16.2 C16.2@888.79,824.78 ; v2@907.84,828 v2(906.14,826.31) ; v2(1051,1271) 1051,1234 1050,1233 R7.1@1057,1226 ; C16.2@888.79,824.78 890.32,826.31 v2(906.14,826.31) ; C16.2@888.79,824.78 904.61,824.78 v2(906.14,826.31)
  Top Layer w22: v2(1239,1583) 1237.85,1581.85 1237.85,1577.61 1237,1576.76 v2(1237,1549.88) 1237,1523 1300,1460 1644.08,1460 P2.2 ; v2(1569,278) 1569.16,277.84 1619.23,277.84 R4.2
  Top Layer w30: U1.2 1162.89,1609.55 1169.03,1615.69 1239,1615.69 v2(1239,1583) ; C13.1@1240,1619 1287.7,1619 1411.09,1742.39 1412.08,1742.39 1415.38,1745.7 1415.38,1746.69 1414.38,1747.69 1414.38,1925.69 R1.2@1413.38,1926.69
  Bottom Layer w20: 270,1088 294,1112 ; 270,1112 294,1112 ; 270,1138 270,1136 294,1112 ; v2(353,1112) 294,1112 ; v2(586,813) 639,813 654,828 904.45,828 v2(906.14,826.31) ; v2(629,1271) v2(1051,1271)
  Bottom Layer w22: P1.20@210,606 273,543 273,262 363,172 1463,172 v2(1569,278)
  Bottom Layer w30: P1.20 270,679.05 270,1088 270,1112 270,1136 270,1439.08 P1.2 279,1588.05 279,1797 324,1842 760,1842 889.5,1712.5 1109.5,1712.5 v2(1239,1583) 1239,1551.88 v2(1237,1549.88)
VDDA: C15.1 R7.2 U2.9 | length 200.4
  Top Layer w8: U2.9 918.9,1090.9 977.69,1149.69 977.69,1151.39 986.98,1160.69 C15.1@992,1160.69
  Top Layer w20: C15.1 R7.2@992,1233
pads on no net: P6.A8 P6.B8 P7.A8 P7.B8 S2.0 S2.2

## Polygon pours and split planes (outlines as drawn)
GND on Bottom Layer "GND" (hatched 90Degree grid 8 track 8, remove dead copper, pour order 0): -1,2029 -1,-3 1805,-3 1805,2022 1802,2022
GND on Top Layer "GND" (hatched 90Degree grid 8 track 8, remove dead copper, pour order 1): -8,2022 1805,2022 1805,-7 -8,-7

## Keep-outs
Keep-Out Layer:
  the board outline again, w15

## Other copper
Bottom Layer:
  rectangle net GND: 641.99,955.73 853.41,1142.8

## Silkscreen, mask and mechanical layers (free items; w line width, h text height)
Top Overlay:
  region: 1565.06,1611.85 1610.16,1611.85 1587.33,1567.51
  region: 1316.49,1584.24 1361.59,1584.24 1338.76,1539.89
  region: 277.09,1596.76 322.19,1596.76 299.36,1552.41
  region: 76.83,1612.6 121.93,1612.6 99.1,1568.26
  lines w10: 49.82,508.25 22.93,508.25 22.93,249.65 64.24,249.65 ; 253.53,152.17 253.53,279.56 ; 375.87,1542.18 375.87,760.43 400.7,760.43 400.7,604.5 ; 1404.76,472.83 1404.76,1554.57
  text "GND" at 264.2,1493.46 h32
  text "3V3" at 394.4,1493.46 h32
  text "LED1" at 1292.09,1482.4 h32
  text "LED2" at 1420.95,1482.4 h32
  text "PA0" at 264.2,1393.46 h32
  text "PA1" at 394.4,1393.46 h32
  text "VBAT" at 1264.97,1388.54 h32
  text "3V3" at 1440.77,1388.54 h32
  text "PA2" at 264.2,1293.46 h32
  text "PA3" at 394.4,1293.46 h32
  text "PB9" at 1298.33,1288.32 h32
  text "GND" at 1437.41,1287.98 h32
  text "PA4" at 264.2,1193.45 h32
  text "PA5" at 394.4,1193.45 h32
  text "PC13" at 1283,1188.11 h32
  text "PA13" at 1413.95,1187.42 h32
  text "PA6" at 264.2,1093.45 h32
  text "PA7" at 394.4,1093.45 h32
  text "PB8" at 1296.81,1087.89 h32
  text "PA14" at 1412.43,1086.86 h32
  text "PB0" at 264.2,993.45 h32
  text "PB1" at 394.4,993.45 h32
  text "PB7" at 1296.81,987.67 h32
  text "NRST" at 1410.6,986.3 h32
  text "PB2" at 264.2,893.44 h32
  text "PB10" at 394.4,893.44 h32
  text "PB6" at 1298.33,887.45 h32
  text "PB5" at 1440.77,885.74 h32
  text "PB11" at 264.2,793.44 h32
  text "PB12" at 391.4,793.44 h32
  text "PB4" at 1295.29,787.24 h32
  text "PB3" at 1440.77,785.17 h32
  text "PB13" at 264.2,693.44 h32
  text "PB14" at 414.4,693.44 h32
  text "PA15" at 1277,687.02 h32
  text "PA12" at 1413.95,684.61 h32
  text "PB15" at 264.2,618.43 h32
  text "3V3" at 414.4,618.43 h32
  text "PA11" at 1283.71,586.8 h32
  text "PA10" at 1413.95,584.05 h32
  text "PA9" at 1294.98,486.59 h32
  text "PA8" at 1437.41,483.49 h32
  text "CH32x203C8U6-R0-1v0" at 1086.6,399.19 h35
  text "BOOT0" at 72.67,229.73 h35
  text "GND" at 268.54,229.73 h35
  text "BOOT1" at 72.67,143.63 h35
  text "GND" at 268.54,143.63 h35
Mechanical 1:
  the board outline again, w8

## Text inside footprints (layer, text, board x,y; h text height)
D1: Top Overlay "+" at 1569.94,1920.7 h40 r90
D2: Top Overlay "+" at 1569.94,1827.2 h40 r90
D3: Top Overlay "+" at 1569.94,1733.7 h40 r90
P8: Top Overlay "G" at 825.29,391.69 h40; Top Overlay "V" at 545.29,391.69 h40; Top Overlay "D+" at 715.29,391.69 h40; Top Overlay "D-" at 625.29,391.69 h40